# EAGLE board Tinkercad file of design circuit 2 to operate the eyes (EAGLE 7.6.0)

Size 56.82 x 53.33 mm. Coordinates in mm from the lower left corner, seen from the top.
Outline: 0,0 56.82,0 56.82,53.33 0,53.33 0,0
Copper layers (1*16): Top 0.035mm / dielectric 1.5mm / Bottom 0.035mm
Design rules "default": minimum track width 10mil, minimum drill 24mil, track to track 8mil, track to pad 8mil, pad to pad 8mil, via to via 8mil, smd to smd 8mil, copper to edge 40mil, drill to drill 8mil, minimum pad ring 10mil, minimum via ring 8mil, stop-mask expansion 4mil, vias tented up to drill 0mil, thermal gap 10mil

## Footprints (pad centres in the part's own frame; a part is rotated, then mirrored left to right if it is on the bottom)
CR2032H = drill 1.118 pad 2.54 octagon: + 5.08,10.795; +@1 -5.08,10.795; - 0,-6.985
LED5MM = drill 0.813 octagon: A -1.27,0; K 1.27,0
0207/10 = drill 0.813 octagon: 1 -5.08,0; 2 5.08,0

## Placement (x,y rotation side)
BAT1  [CR2032H]  5,48.18 0 top
D2  [LED5MM]  5,22.78 0 top
D3  [LED5MM]  5,10.08 0 top
R2  50‎Ω  [0207/10]  5,60.88 0 top  (outside the outline)
R3  50‎Ω  [0207/10]  5,35.48 0 top

## Library data of the parts
BAT1 D2 D3 R2 R3 = AUTODESK_CIRCUITS_BREADBOARD

## Nets
N$1: BAT1.- D2.K D3.K
N$2: D2.A R3.1
N$3: D3.A R2.1
N$4: BAT1.+ BAT1.+@1 R2.2 R3.2

## Tracks (layer width: path | path; a pad name or v marks a point on that pad's centre or on a via)
N$1  (2 unrouted)
N$2  (1 unrouted)
N$3  (1 unrouted)
N$4  (3 unrouted)